# Altium PCB Input interface for DBL165 ShiftIn Reg.PcbDoc
Units mm, origin at the board's own origin, x right, y up, seen from the top; angles counter-clockwise.
Board outline 152.4 x 101.6 mm, 2 copper layers (Top Layer, Bottom Layer); 17 components, 57 nets, 52 pads, 4 vias.
Unrouted connection lines stored in the file: 1.
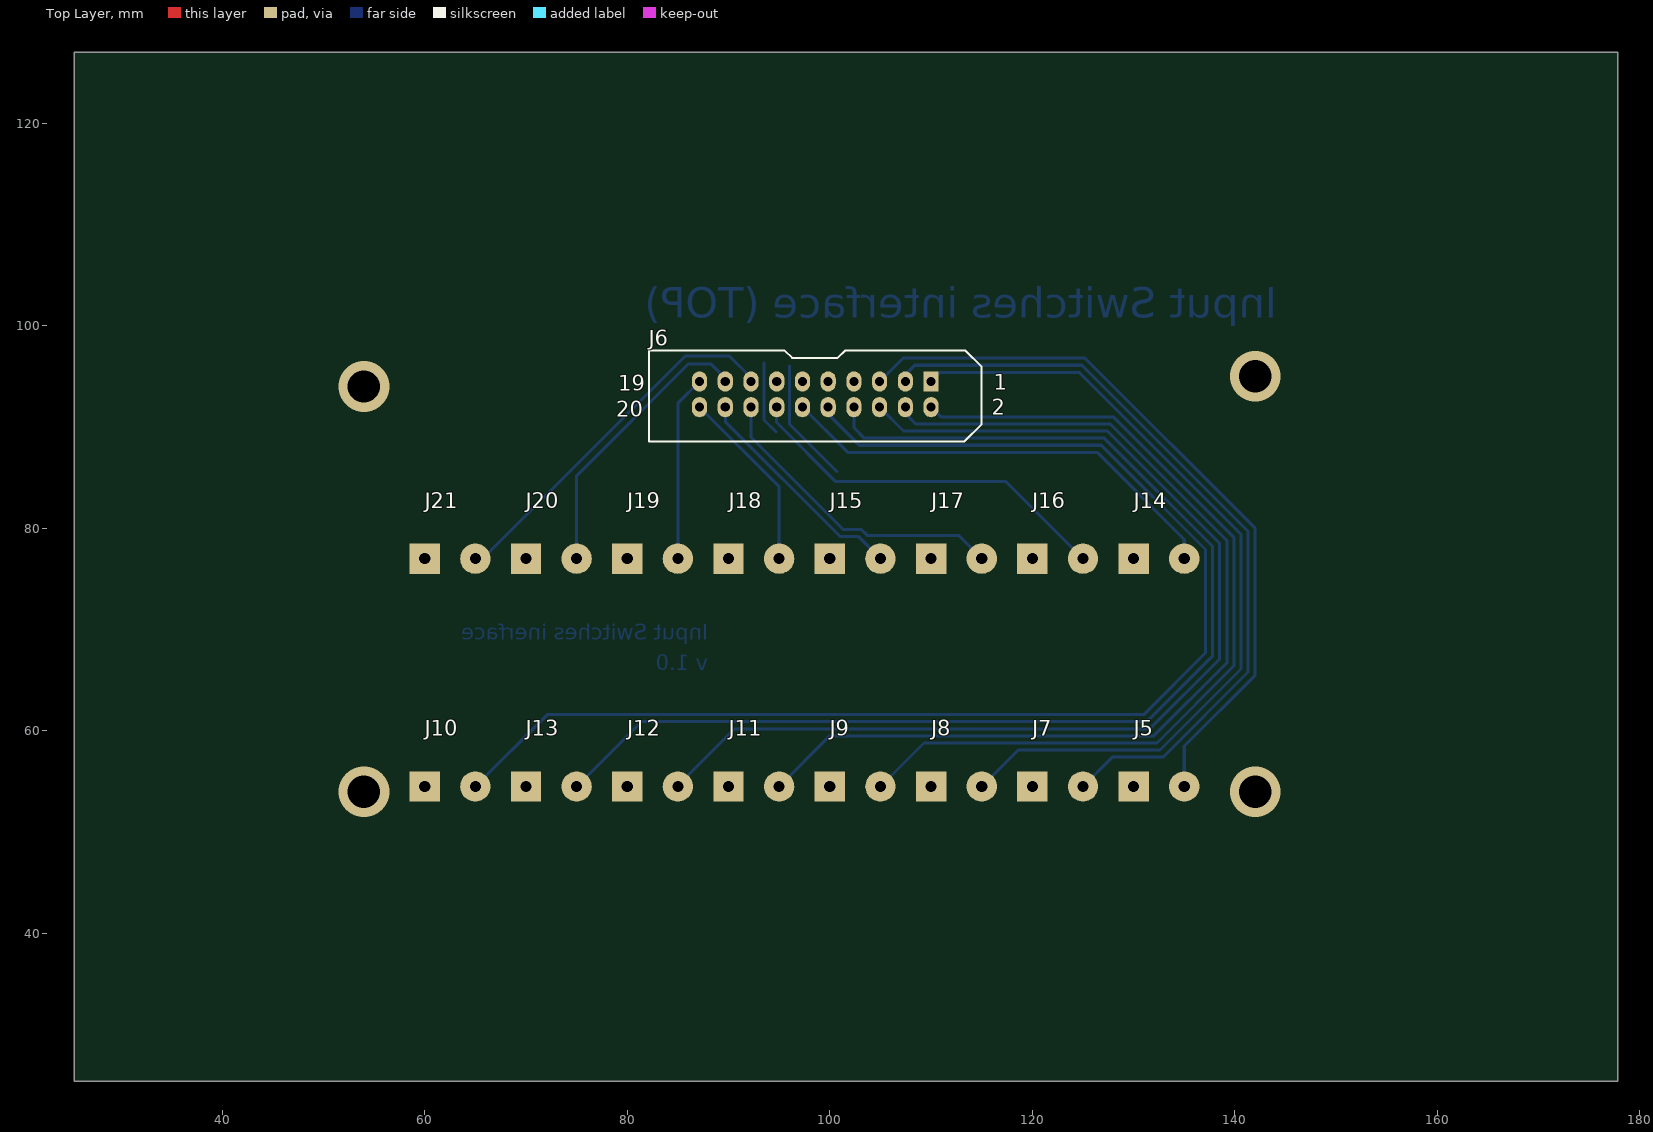
[diagram p0: Top Layer view]
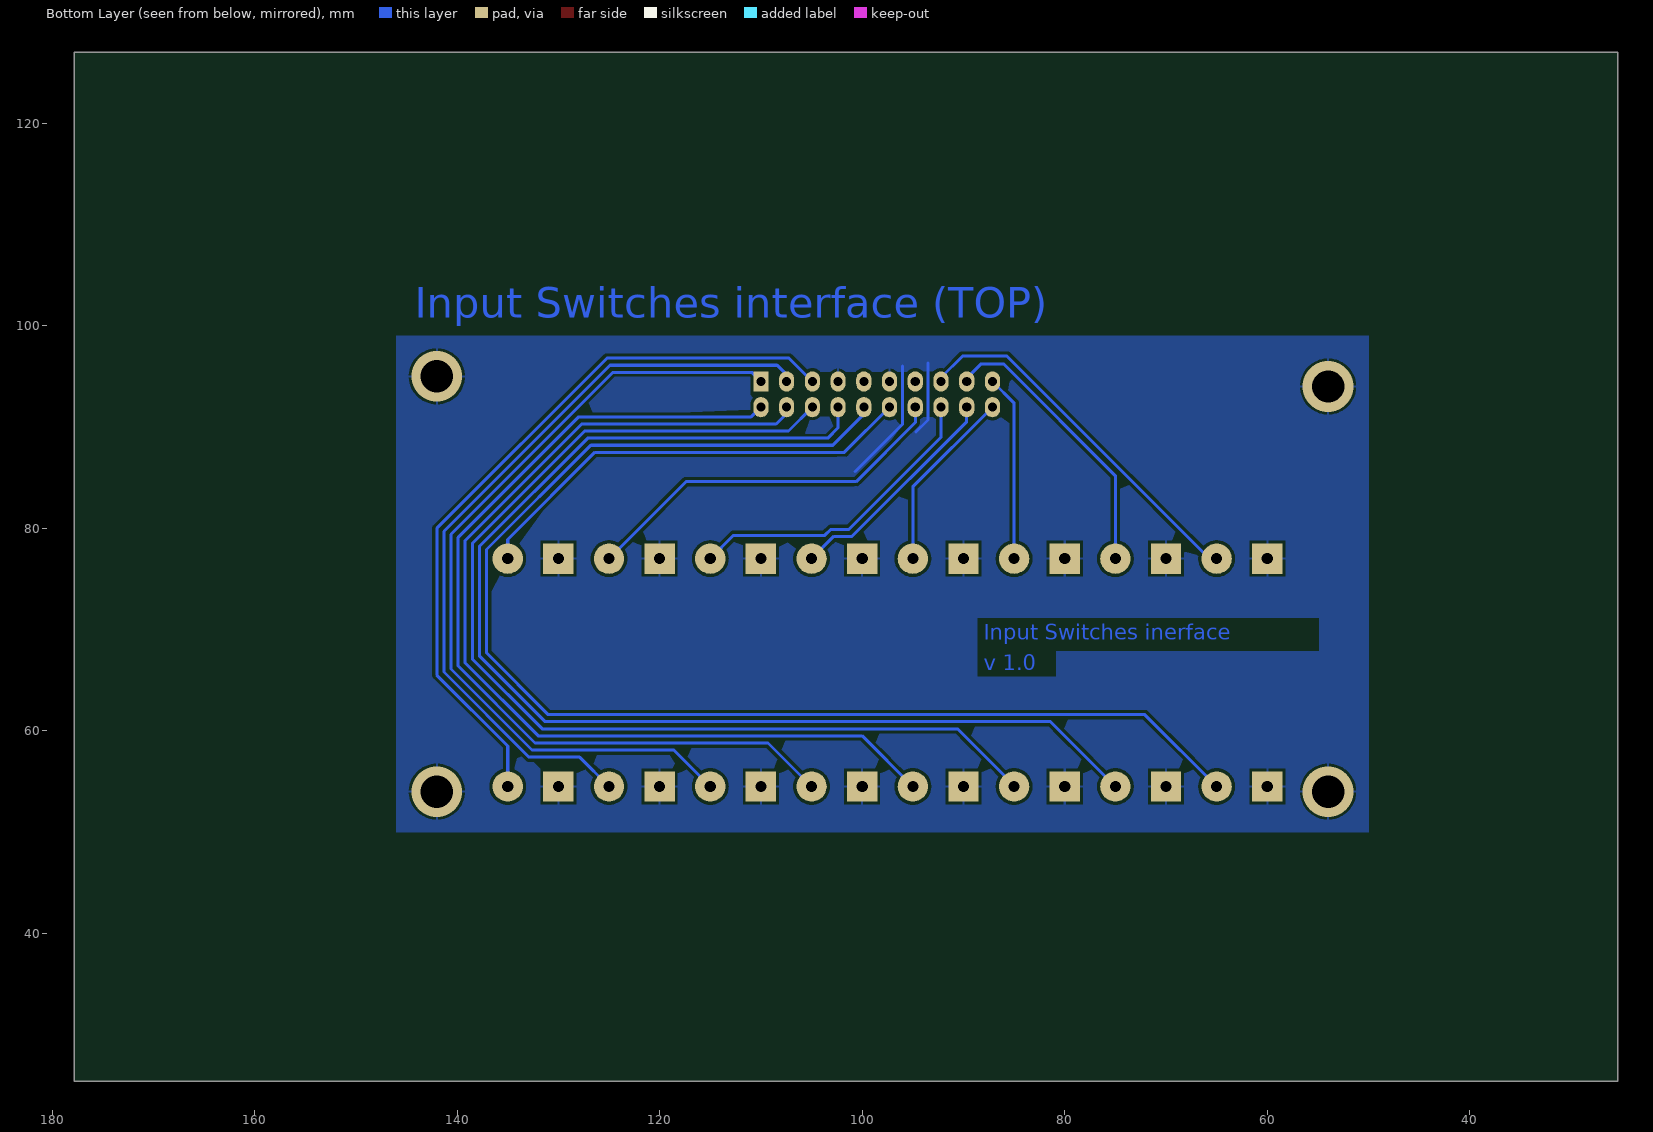
[diagram p1: Bottom Layer view, seen from below]
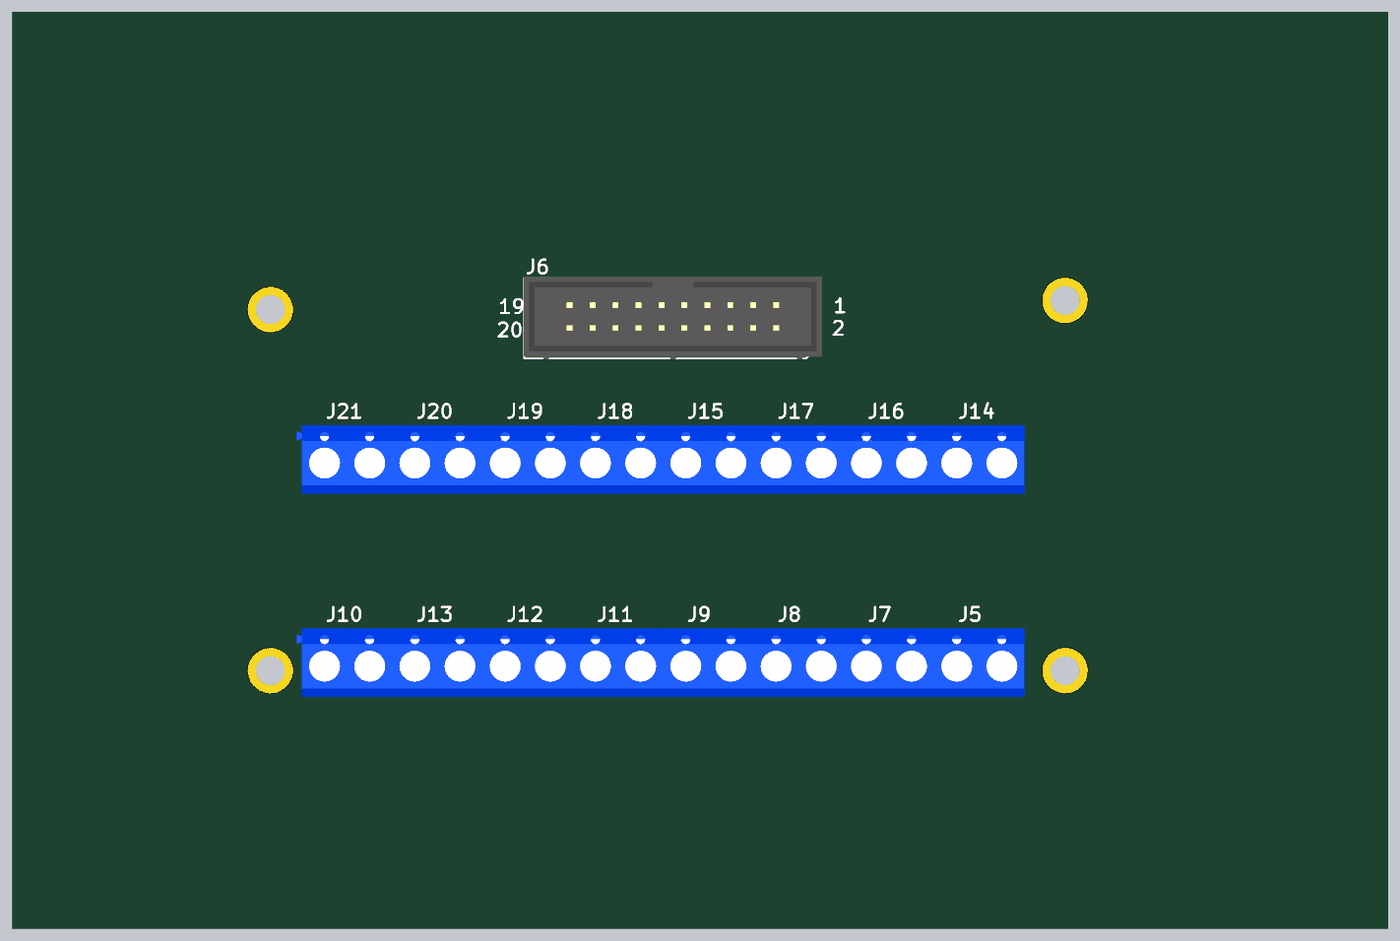
[diagram p2: 3D render of the assembled board from above, using the file's embedded part models]

## Layer stack, top to bottom
Top Solder: solder mask 0.0102, Solder Resist, Dk 3.5
Top Layer: signal copper 0.0356
Dielectric 1: dielectric 0.32, FR-4, Dk 4.8
Bottom Layer: signal copper 0.0356
Bottom Solder: solder mask 0.0102, Solder Resist, Dk 3.5

## Board outline
25.4,25.4 177.8,25.4 177.8,127 25.4,127

## Design rules (kind name [scope] priority, off if disabled: settings)
Clearance [All] p1: gap=0.3
ComponentClearance [All] p1: gap=0 collisioncheckmode=3 verticalgap=0.2 showdistances=FALSE
PolygonConnect [All] p1: connectstyle=Relief reliefconductorwidth=0.254 reliefentries=4 polygonreliefangle="90 Angle" airgapwidth=0.254
RoutingVias [All] p1: holewidth=0.711 width=1.27 viastyle="Through Hole" minholewidth=0.711 minwidth=1.27 maxholewidth=0.711 maxwidth=1.27
SolderMaskExpansion [All] p1: expansion=0.102
Width [All] p1: maxlimit=1 minlimit=0.3 preferedwidth=0.3
28 further rules are at their usual default settings.

## Components (designator, comment, footprint, x,y, rotation, side; value= is the part's Value field where it differs from the comment)
J5 "Connector" "DG301 5mm 2p" 130,54.5 r0 top
J6 "To DBL 165 ShiftIn" "LINE 2.54 x 20D (2 x 10) - BH" 110,94.5 r270 top
J7 "Connector" "DG301 5mm 2p" 120,54.5 r0 top
J8 "Connector" "DG301 5mm 2p" 110,54.5 r0 top
J9 "Connector" "DG301 5mm 2p" 100,54.5 r0 top
J10 "Connector" "DG301 5mm 2p" 60,54.5 r0 top
J11 "Connector" "DG301 5mm 2p" 90,54.5 r0 top
J12 "Connector" "DG301 5mm 2p" 80,54.5 r0 top
J13 "Connector" "DG301 5mm 2p" 70,54.5 r0 top
J14 "Connector" "DG301 5mm 2p" 130,77 r0 top
J15 "Connector" "DG301 5mm 2p" 100,77 r0 top
J16 "Connector" "DG301 5mm 2p" 120,77 r0 top
J17 "Connector" "DG301 5mm 2p" 110,77 r0 top
J18 "Connector" "DG301 5mm 2p" 90,77 r0 top
J19 "Connector" "DG301 5mm 2p" 80,77 r0 top
J20 "Connector" "DG301 5mm 2p" 70,77 r0 top
J21 "Connector" "DG301 5mm 2p" 60,77 r0 top

## Footprints (in the part's own frame and the unit in brackets; to place one, negate y for a bottom-side part, rotate by r counter-clockwise, add the part's x,y. Pads: shape width x height; smd on the part's side, far side on the other; paste and mask are expansions set on the pad)
"DG301 5mm 2p" [mm]
  rect 3x3 hole 1.1: 1(0,0)
  round 3 hole 1.1: 2(5,0)
  body extent -3.1,-3.4 7.5,4.2, height 10
"LINE 2.54 x 20D (2 x 10) - BH" [mm]
  rect 2x1.5 hole 0.9: 1(0,0)
  oval 2x1.5 hole 0.9: 2(2.54,0) 3(0,-2.54) 4(2.54,-2.54) 5(0,-5.08) 6(2.54,-5.08) 7(0,-7.62) 8(2.54,-7.62) 9(0,-10.16) 10(2.54,-10.16) 11(0,-12.7) 12(2.54,-12.7) 13(0,-15.24) 14(2.54,-15.24) 15(0,-17.78) 16(2.54,-17.78) 17(0,-20.32) 18(2.54,-20.32) 19(0,-22.86) 20(2.54,-22.86)
  silkscreen extent -3.05,-27.87 5.92,5, body extent -3.18,-27.95 6.02,5.1, height 8.84

## Part data
J5 J7 J8 J9 J10 J11 J12 J13 J14 J15 J16 J17 J18 J19 J20 J21: library part DG301-5.0-2P12, "DG301 series"
J6: library part "PLD-20 (2 x 10)", "Vert, Dbl line, Male"

## Via types
v1: diameter 5, hole 3.2, Top Layer to Bottom Layer, 4 vias

## Nets (pads, with @x,y where several pads share a name; then routed paths per layer and width w, separated by ;. In a path a pad name is that pad's centre, name@x,y a point inside that pad or via, vN(x,y) a via of type N, cw(c..) or ccw(c..) an arc to the next point about the centre after c; other vN are vias at no path point)
165TO165: 
+5V: J6.9 J6.13 | length 0
  Bottom Layer w0.3: J6.13 J6.13@94.76,94.54
"B 1": J5.2 J6.5 | length 73.6
  Bottom Layer w0.3: J6.5 107.22,96.8 125.2,96.8 142,80 142,65.5 135,58.5 J5.2@135,54.3
"B 2": J6.3 J7.2 | length 76.6
  Bottom Layer w0.3: J6.3 107.46,95.16 108.4,96.1 124.9,96.1 141.3,79.7 141.3,65.8 132.9,57.4 127.9,57.4 J7.2
"B 3": J6.1 J8.2 | length 81.3
  Bottom Layer w0.3: J6.1 110.9,95.4 124.6,95.4 140.6,79.4 140.6,66.1 132.6,58.1 118.6,58.1 J8.2
"B 4": J6.2 J9.2 | length 87.8
  Bottom Layer w0.3: J9.2 109.3,58.8 132.3,58.8 139.9,66.4 139.9,79.1 128,91 110.96,91 J6.2
"B 5": J6.4 J11.2 | length 98.9
  Bottom Layer w0.3: J11.2 100,59.5 132,59.5 139.2,66.7 139.2,78.8 127.7,90.3 108.5,90.3 107.46,91.34 J6.4
"B 6": J6.6 J12.2 | length 109.5
  Bottom Layer w0.3: J12.2@85,54.3 85,54.6 90.6,60.2 131.6,60.2 138.5,67.1 138.5,78.5 127.4,89.6 107.28,89.6 J6.6
"B 7": J6.8 J13.2 | length 121.3
  Bottom Layer w0.3: J13.2 81.4,60.9 131.3,60.9 137.8,67.4 137.8,78.2 127.1,88.9 103.4,88.9 102.38,89.92 J6.8
"B 8": J6.10 J10.2 | length 131.3
  Bottom Layer w0.3: J10.2 72.1,61.6 131,61.6 137.1,67.7 137.1,77.9 126.8,88.2 102.9,88.2 99.84,91.26 J6.10
"B 9": J6.12 J14.2 | length 45
  Bottom Layer w0.3: J6.12 101.76,87.5 126.4,87.5 135,78.9 J14.2
"B 10": J6.14 J16.2 | length 37.3
  Bottom Layer w0.3: J6.14 94.76,90.44 100.6,84.6 117.4,84.6 J16.2
"B 11": J6.16 J17.2 | length 30.7
  Bottom Layer w0.3: J6.16 92.22,88.98 101.3,79.9 103.09,79.9 103.69,79.3 112.7,79.3 J17.2
"B 12": J6.18 J15.2 | length 22.4
  Bottom Layer w0.3: J6.18 89.68,90.52 101,79.2 102.8,79.2 J15.2
"B 13": J6.20 J18.2 | length 18.2
  Bottom Layer w0.3: J6.20 95,84.1 J18.2
"B 14": J6.19 J19.2 | length 18.4
  Bottom Layer w0.3: J19.2 85,92.36 J6.19
"B 15": J6.17 J20.2 | length 28.3
  Bottom Layer w0.3: J20.2 75,85.2 86,96.2 88.3,96.2 89.68,94.82 J6.17
"B 16": J6.15 J21.2 | length 36.8
  Bottom Layer w0.3: J21.2 65.7,77 85.7,97 90.1,97 92.22,94.88 J6.15
"BT 1": 
"BT 2": 
"BT 3": 
"BT 4": 
"BT 5": 
"BT 6": 
"BT 7": 
"BT 8": 
"BT 9": 
"BT 10": 
"BT 11": 
"BT 12": 
"BT 13": 
"BT 14": 
"BT 15": 
"BT 16": 
CLK165: 
GND: J5.1 J6.7 J6.11 J7.1 J8.1 J9.1 J10.1 J11.1 J12.1 J13.1 J14.1 J15.1 J16.1 J17.1 J18.1 J19.1 J20.1 J21.1 | length 19.6
  Bottom Layer w0.3: 93.5,96.3 93.5,90.7 94.7,89.5 ; 96,96 96,90.3 100.7,85.6
  other v1: 54,54 142,54 54,94 142,95
"IN 1": 
"IN 2": 
"IN 3": 
"IN 4": 
"IN 5": 
"IN 6": 
"IN 7": 
"IN 8": 
"IN 9": 
"IN 10": 
"IN 11": 
"IN 12": 
"IN 13": 
"IN 14": 
"IN 15": 
"IN 16": 
LATCH165: 
NetD1_A: 
NetD2_A: 
"SERIAL IN": 
SERIALOUT165: 

## Polygon pours and split planes (outlines as drawn)
GND on Bottom Layer "Top Layer-No Net" (solid, pour order 2): 146,99 146,50 50,50 50,99

## Other copper
Bottom Layer:
  text "Input Switches interface (TOP)" at 144.2,100.8 h3
  text "Input Switches inerface" at 88,69 h1.5
  text "v 1.0" at 88,66 h1.5

## Text inside footprints (layer, text, board x,y; h text height)
J6: Top Overlay "1" at 116.2,93.7 h1.52; Top Overlay "2" at 116,91.2 h1.52; Top Overlay "19" at 79.1,93.6 h1.52; Top Overlay "20" at 78.9,91 h1.52